# EAGLE board RS485-relaydriver (EAGLE 5.11)
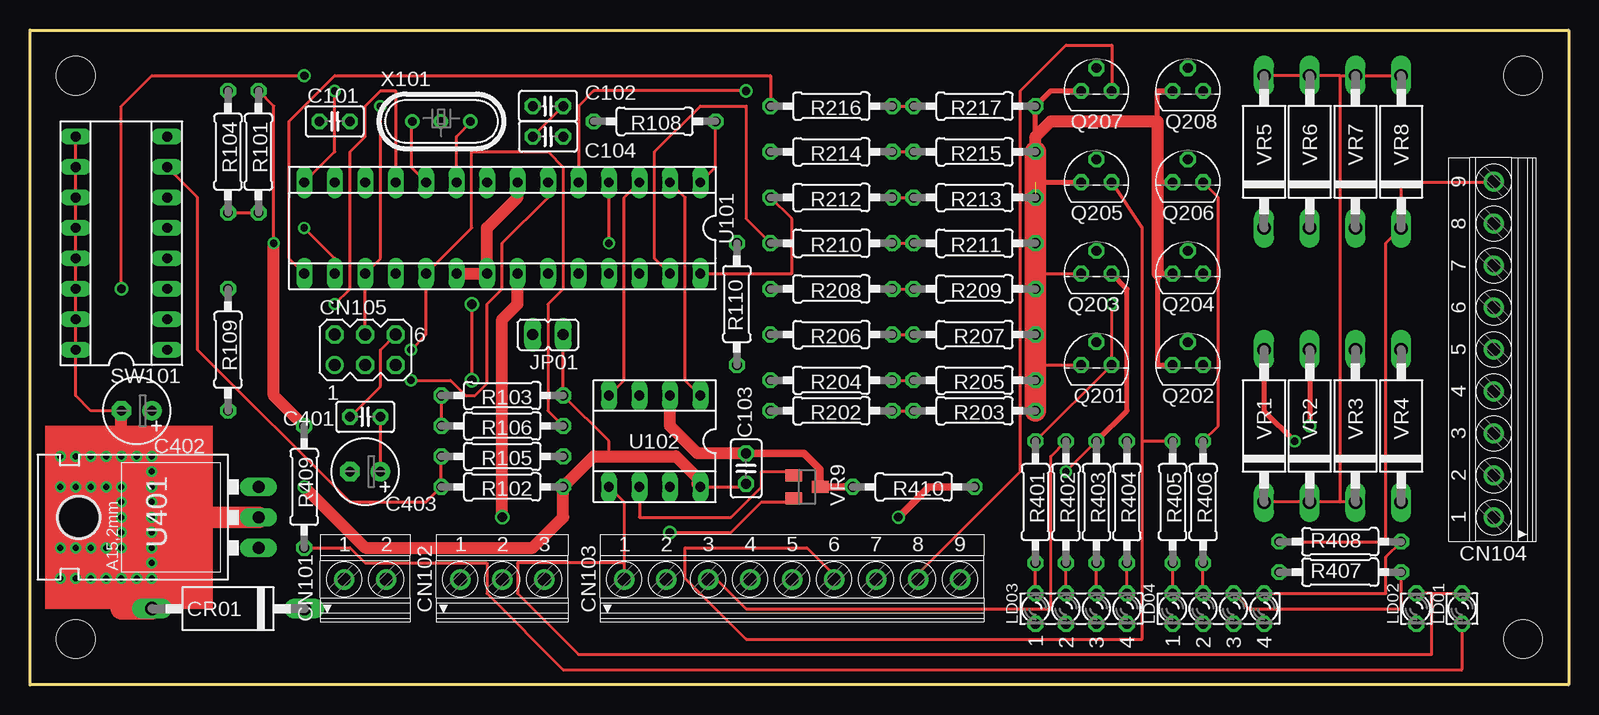
[diagram p0: board, top side]
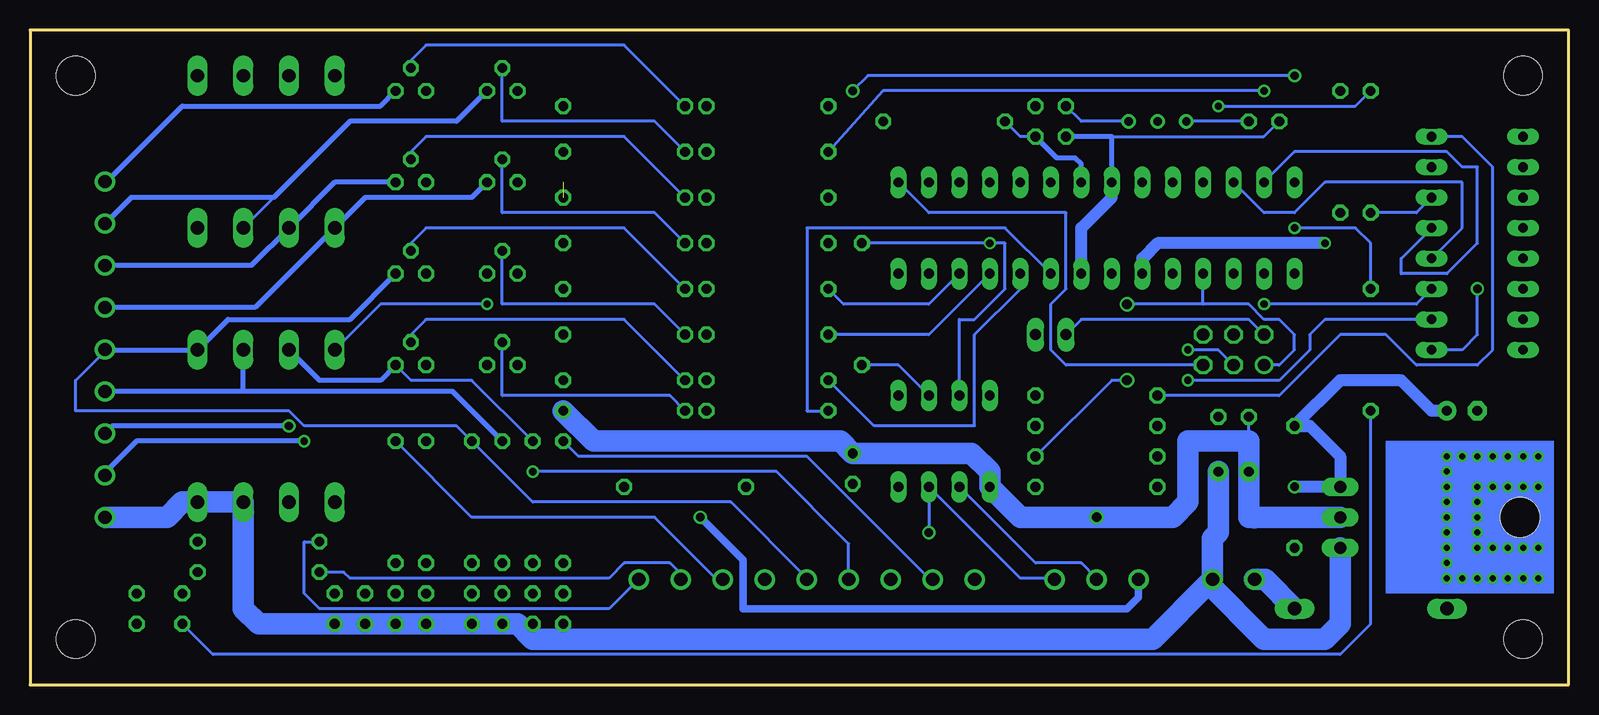
[diagram p1: board, bottom side, seen from below]

Size 128.27 x 54.61 mm. Coordinates in mm from the lower left corner, seen from the top.
Outline: 0,54.61 128.27,54.61 128.27,0 0,0 0,54.61
Copper layers (1*16): Top 0.035mm / dielectric 1.5mm / Bottom 0.035mm
Design rules "default": minimum track width 10mil, minimum drill 24mil, track to track 8mil, track to pad 8mil, pad to pad 8mil, via to via 8mil, smd to smd 8mil, copper to edge 40mil, drill to drill 8mil, minimum pad ring 10mil, minimum via ring 8mil, stop-mask expansion 4mil, vias tented up to drill 0mil, thermal gap 10mil
Holes 3.2 mm at 3.81,50.8 124.46,50.8 124.46,3.81 3.81,3.81

## Footprints (pad centres in the part's own frame; a part is rotated, then mirrored left to right if it is on the bottom)
C025-025X050 = drill 0.813 octagon: 1 -1.27,0; 2 1.27,0
E2,5-6 = drill 0.813 pad 1.6 round: + -1.27,0 | drill 0.813 pad 1.6 octagon: - 1.27,0
1751248 = drill 1.1 pad 1.7 round: 1 -1.75,-0.1; 2 1.75,-0.1
1751251 = drill 1.1 pad 1.7 round: 1 -3.5,-0.1; 2 0,-0.1; 3 3.5,-0.1
1751316 = drill 1.1 pad 1.7 round: 1 -13.973,-0.1; 2 -10.473,-0.1; 3 -6.973,-0.1; 4 -3.473,-0.1; 5 0.028,-0.1; 6 3.527,-0.1; 7 7.027,-0.1; 8 10.527,-0.1; 9 14.027,-0.1
MA03-2 = drill 1.016 round: 1 -2.54,-1.27 | drill 1.016 octagon: 2 -2.54,1.27; 3 0,-1.27; 4 0,1.27; 5 2.54,-1.27; 6 2.54,1.27
DO15-12 = drill 1.118 long: A 6.35,0; C -6.35,0
JP1 = drill 0.914 long: 1 0,-1.27; 2 0,1.27
LZR181 = drill 0.813 octagon: A -1.27,0; K 1.27,0
LZR184 = drill 0.813 octagon: A1 -1.27,3.81; A2 -1.27,1.27; A3 -1.27,-1.27; A4 -1.27,-3.81; K1 1.27,3.81; K2 1.27,1.27; K3 1.27,-1.27; K4 1.27,-3.81
TO92 = drill 0.813 octagon: 1 1.27,0; 2 0,1.905; 3 -1.27,0
0207/10 = drill 0.813 octagon: 1 -5.08,0; 2 5.08,0
SOCKET-16 = drill 0.813 long: 1 -8.89,-3.81; 2 -6.35,-3.81; 3 -3.81,-3.81; 4 -1.27,-3.81; 5 1.27,-3.81; 6 3.81,-3.81; 7 6.35,-3.81; 8 8.89,-3.81; 9 8.89,3.81; 10 6.35,3.81; 11 3.81,3.81; 12 1.27,3.81; 13 -1.27,3.81; 14 -3.81,3.81; 15 -6.35,3.81; 16 -8.89,3.81
SOCKET-28-3 = drill 0.813 long: 1 -16.51,-3.81; 2 -13.97,-3.81; 3 -11.43,-3.81; 4 -8.89,-3.81; 5 -6.35,-3.81; 6 -3.81,-3.81; 7 -1.27,-3.81; 8 1.27,-3.81; 9 3.81,-3.81; 10 6.35,-3.81; 11 8.89,-3.81; 12 11.43,-3.81; 13 13.97,-3.81; 14 16.51,-3.81; 15 16.51,3.81; 16 13.97,3.81; 17 11.43,3.81; 18 8.89,3.81; 19 6.35,3.81; 20 3.81,3.81; 21 1.27,3.81; 22 -1.27,3.81; 23 -3.81,3.81; 24 -6.35,3.81; 25 -8.89,3.81; 26 -11.43,3.81; 27 -13.97,3.81; 28 -16.51,3.81
SOCKET-08 = drill 0.813 long: 1 -3.81,-3.81; 2 -1.27,-3.81; 3 1.27,-3.81; 4 3.81,-3.81; 5 3.81,3.81; 6 1.27,3.81; 7 -1.27,3.81; 8 -3.81,3.81
TO220L1 = drill 1.016 long: 1 -2.54,-3.81; 2 0,-3.81; 3 2.54,-3.81 | hole 3.302: 0,11.176
SOT23 = smd 1 x 1.4: 1 -0.95,-1.1; 2 0.95,-1.1; 3 0,1.1
HC49U = drill 0.7 pad 1.2 round: 1 -2.413,0; 2 -0.027,0; 3 2.413,0

## Placement (x,y rotation side)
C101  [C025-025X050]  25.4,46.99 0 top
C102  [C025-025X050]  43.18,48.26 180 top
C103  [C025-025X050]  59.69,18.03 270 top
C104  [C025-025X050]  43.18,45.72 0 top
C401  [C025-025X050]  27.94,22.35 0 top
C402  [E2,5-6]  8.89,22.86 180 top
C403  [E2,5-6]  27.94,17.78 180 top
CN101  PWR  [1751248]  27.94,8.89 0 top
CN102  RS485  [1751251]  39.37,8.89 0 top
CN103  BUTTONS  [1751316]  63.5,8.89 0 top
CN104  RELAYS  [1751316]  121.92,27.94 90 top
CN105  [MA03-2]  27.94,27.94 0 top
CR01  [DO15-12]  16.51,6.35 180 top
JP01  [JP1]  43.18,29.21 90 top
LD01  [LZR181]  119.38,6.35 90 top
LD02  [LZR181]  115.57,6.35 90 top
LD03  [LZR184]  87.63,6.35 90 top
LD04  [LZR184]  99.06,6.35 90 top
Q201  [TO92]  88.9,26.67 0 top
Q202  [TO92]  96.52,26.67 0 top
Q203  [TO92]  88.9,34.29 0 top
Q204  [TO92]  96.52,34.29 0 top
Q205  [TO92]  88.9,41.91 0 top
Q206  [TO92]  96.52,41.91 0 top
Q207  [TO92]  88.9,49.53 0 top
Q208  [TO92]  96.52,49.53 0 top
R101  [0207/10]  19.05,44.45 90 top
R102  [0207/10]  39.37,16.51 0 top
R103  [0207/10]  39.37,24.13 0 top
R104  [0207/10]  16.51,44.45 90 top
R105  [0207/10]  39.37,19.05 0 top
R106  [0207/10]  39.37,21.59 0 top
R108  [0207/10]  52.07,46.99 0 top
R109  [0207/10]  16.51,27.94 90 top
R110  [0207/10]  58.93,31.75 270 top
R202  [0207/10]  66.8,22.86 0 top
R203  [0207/10]  78.74,22.86 0 top
R204  [0207/10]  66.8,25.4 0 top
R205  [0207/10]  78.74,25.4 0 top
R206  [0207/10]  66.8,29.21 0 top
R207  [0207/10]  78.74,29.21 0 top
R208  [0207/10]  66.8,33.02 0 top
R209  [0207/10]  78.74,33.02 0 top
R210  [0207/10]  66.8,36.83 0 top
R211  [0207/10]  78.74,36.83 0 top
R212  [0207/10]  66.8,40.64 0 top
R213  [0207/10]  78.74,40.64 0 top
R214  [0207/10]  66.8,44.45 0 top
R215  [0207/10]  78.74,44.45 0 top
R216  [0207/10]  66.8,48.26 0 top
R217  [0207/10]  78.74,48.26 0 top
R401  [0207/10]  83.82,15.24 90 top
R402  [0207/10]  86.36,15.24 90 top
R403  [0207/10]  88.9,15.24 90 top
R404  [0207/10]  91.44,15.24 90 top
R405  [0207/10]  95.25,15.24 90 top
R406  [0207/10]  97.79,15.24 90 top
R407  [0207/10]  109.22,9.4 180 top
R408  [0207/10]  109.22,11.94 180 top
R409  [0207/10]  22.86,16.51 90 top
R410  [0207/10]  73.66,16.51 0 top
SW101  [SOCKET-16]  7.62,36.83 90 top
U101  [SOCKET-28-3]  39.37,38.1 180 top
U102  [SOCKET-08]  52.07,20.32 180 top
U401  [TO220L1]  15.24,13.97 90 top
VR1  [DO15-12]  102.87,21.59 90 top
VR2  [DO15-12]  106.68,21.59 90 top
VR3  [DO15-12]  110.49,21.59 90 top
VR4  [DO15-12]  114.3,21.59 90 top
VR5  [DO15-12]  102.87,44.45 90 top
VR6  [DO15-12]  106.68,44.45 90 top
VR7  [DO15-12]  110.49,44.45 90 top
VR8  [DO15-12]  114.3,44.45 90 top
VR9  [SOT23]  64.77,16.51 270 top
X101  [HC49U]  34.29,46.99 0 top

## Library data of the parts
C101-C104 C401-C403 R101-R106 R108-R110 R202-R217 R401-R410 = resistor
CN101-CN104 = con-phoenix-350
CN105 = con-lstb
CR01 VR1-VR8 = diode
JP01 = jumper
LD01-LD04 = led
Q201-Q208 = transistor
SW101 U101 U102 = ic-package
U401 = v-reg
VR9 = smd-ipc
X101 = crystal

## Nets
12V: C401.2 C403.+ CN101.2 CN104.1 LD03.A1 LD03.A2 LD03.A3 LD03.A4 LD04.A1 LD04.A2 LD04.A3 LD04.A4 U401.1 VR1.C VR2.C VR3.C VR4.C VR5.A VR6.A VR7.A VR8.A
AS: CN103.7 CN104.7 Q206.1 R406.2 VR6.C
CN105: CN105.1 R105.2 U101.18
GND: C101.1 C102.1 C103.1 C104.1 C401.1 C402.- C403.- CN103.1 CN105.6 CR01.A LD01.K LD02.K Q201.3 Q202.3 Q203.3 Q204.3 Q205.3 Q206.3 Q207.3 Q208.3 R110.2 R203.2 R205.2 R207.2 R209.2 R211.2 R213.2 R215.2 R217.2 R410.1 SW101.9 SW101.10 SW101.11 SW101.12 SW101.13 SW101.14 SW101.15 SW101.16 U101.8 U101.22 U102.2 U102.5 U401.2 VR9.3
JP1: R202.1 U101.23
R103: R103.1 R106.1 SW101.8
S$1: C102.2 U101.9 X101.3
S$2: C101.2 U101.10 X101.1
S$3: CN102.2 U102.6 VR9.1
S$4: R110.1 U101.4 U102.3
S$5: U101.3 U102.4
S$6: LD01.A R409.1
S$7: LD03.K1 R401.1
S$8: R102.1 R105.1 SW101.7
S$9: R101.1 R104.1 SW101.6
S$10: CN105.2 JP01.2
S$11: CN102.3 U102.7 VR9.2
S$12: U101.2 U102.1
S$13: SW101.5 U101.13
S$14: SW101.4 U101.12
S$15: SW101.3 U101.11
S$16: SW101.2 U101.6
S$17: SW101.1 U101.5
S$18: CN105.3 R106.2 U101.19
S$19: LD03.K3 R403.1
S$20: CN105.4 R104.2 U101.17
S$21: CN105.5 R108.2 U101.1
S$22: LD02.A R109.1
S$23: LD04.K1 R405.1
S$24: LD04.K2 R406.1
S$25: LD04.K3 R407.1
S$26: LD04.K4 R408.1
S$27: CN103.2 CN104.2 Q201.1 R401.2 VR1.A
S$28: CN103.3 CN104.3 Q202.1 R402.2 VR2.A
S$29: CN103.4 CN104.4 Q203.1 R403.2 VR3.A
S$30: CN103.5 CN104.5 Q204.1 R404.2 VR4.A
S$31: CN103.6 CN104.6 Q205.1 R405.2 VR5.C
S$32: CN101.1 CR01.C
S$33: CN103.8 CN104.8 Q207.1 R407.2 VR7.C
S$34: CN103.9 CN104.9 Q208.1 R408.2 VR8.C
S$35: R109.2 U101.16
S$36: Q201.2 R202.2 R203.1
S$37: CN102.1 R410.2
S$38: LD03.K4 R404.1
S$39: LD03.K2 R402.1
S$40: Q202.2 R204.2 R205.1
S$41: Q203.2 R206.2 R207.1
S$42: Q204.2 R208.2 R209.1
S$43: Q205.2 R210.2 R211.1
S$44: Q206.2 R212.2 R213.1
S$45: Q207.2 R214.2 R215.1
S$46: Q208.2 R216.2 R217.1
S$47: R204.1 U101.24
S$48: R206.1 U101.25
S$49: R208.1 U101.26
S$50: R210.1 U101.27
S$51: R212.1 U101.28
S$52: R214.1 U101.14
S$53: R216.1 U101.15
VCC: C103.2 C104.2 C402.+ JP01.1 R101.2 R102.2 R103.2 R108.1 R409.2 U101.7 U101.20 U101.21 U102.8 U401.3

## Tracks (layer width: path | path; a pad name or v marks a point on that pad's centre or on a via)
12V
  Top 0.254: C403.+ C401.2 | VR5.A VR6.A 109.22,50.8 | 109.22,50.8 VR7.A VR8.A | VR1.C VR2.C 109.22,15.24 | VR3.C 109.22,15.24 | 109.22,15.24 109.22,50.8
  Bottom 0.254: 87.63,5.08 LD03.A2 | 83.82,3.81 LD03.A1
  Bottom 1.778: 30.04,8.45 CN101.2 29.69,12.22 29.21,12.7 C403.+ | 30.04,8.45 34.67,3.81 83.82,3.81 86.36,3.81 87.63,5.08 LD03.A3 LD03.A4 LD04.A1 LD04.A2 LD04.A3 LD04.A4 109.22,5.08 110.49,6.35 VR3.C VR4.C 115.57,15.24 116.84,13.97 CN104.1 | U401.1 19.05,5.08 20.32,3.81 25.4,3.81 30.04,8.45
AS
  Top 0.254: R406.2 99.06,21.59 99.06,40.64 Q206.1
  Bottom 0.254: R406.2 91.44,13.97 76.2,13.97 71.12,8.89 CN103.7
  Bottom 0.406: Q206.1 102.87,41.91 VR6.C 109.81,34.97 CN104.7
CN105  (via drill 0.8)
  Top 0.254: v36.83,31.75 v36.83,25.4
  Bottom 0.254: R105.2 38.1,25.4 v36.83,25.4 | 30.48,31.75 v36.83,31.75 | 30.48,31.75 U101.18 | 30.48,31.75 26.67,31.75 25.4,30.48 24.13,30.48 22.86,29.21 22.86,27.94 24.13,26.67 CN105.1
GND  (via drill 0.5, 0.5 pad 0.25, 0.8)  (1 unrouted)
  Top 0.254: 83.82,34.29 Q203.3 | 83.82,26.67 Q201.3 | 116.84,7.62 LD01.K | 116.84,7.62 LD02.K | C104.1 C102.1 | 116.84,7.62 116.84,2.54 45.72,2.54 40.64,7.62 40.64,10.16 49.53,10.16 | CN103.1 49.53,8.89 49.53,10.16 | 49.53,10.16 49.53,15.24 U102.5 | SW101.9 SW101.10 SW101.11 SW101.12 SW101.13 SW101.14 SW101.15 SW101.16 3.81,24.13 5.08,22.86 C402.- | CN105.6 29.21,27.94 29.21,24.89 C401.1
  Top 0.406: Q202.3 93.98,26.67 93.98,34.29 Q204.3 | Q208.3 93.98,49.53 93.98,46.99 | 93.98,41.91 Q206.3 | Q207.3 85.09,49.53 R217.2 R215.2 | 83.82,41.91 Q205.3
  Top 0.61: R410.1 VR9.3 65.87,17.95 64.52,19.3 C103.1
  Top 1.016: 93.98,34.29 93.98,41.91 93.98,46.99 85.09,46.99 83.82,45.72 R215.2 | U102.2 53.34,21.59 55.63,19.3 C103.1 | U101.22 40.64,31.75 39.37,30.48 v39.37,13.97 | v7.62,13.97 v7.62,15.24 v7.62,16.51 v7.62,19.05 C402.-
  Top 1.778: R215.2 83.82,41.91 R211.2 83.82,34.29 R209.2 R207.2 83.82,26.67 R205.2 R203.2 | CR01.A 7.62,6.35 v7.62,8.89 v7.62,11.43 v7.62,12.7 v7.62,13.97 v10.16,13.97 U401.2
  Bottom 0.254: R110.2 55.88,26.67 U102.2 | C101.1 25.4,45.72 38.1,45.72 | R203.2 82.55,21.59 | 26.67,20.32 C401.1
  Bottom 0.406: C104.1 38.1,45.72 U101.8
  Bottom 1.016: U101.8 38.1,40.64 40.64,38.1 U101.22
  Bottom 1.778: R203.2 81.28,20.32 60.71,20.32 C103.1 49.78,19.3 48.26,17.78 U102.5 45.72,13.97 v39.37,13.97 33.02,13.97 31.75,15.24 31.75,20.32 26.67,20.32 C403.- 26.67,13.97 26.16,13.97 | 26.16,13.97 26.19,13.94 | U401.2 26.16,13.97
JP1
  Bottom 0.254: U101.23 46.99,38.1 63.5,38.1 63.5,22.86 R202.1
R103
  Top 0.254: R103.1 R106.1
  Bottom 0.254: SW101.8 8.89,45.72 6.35,43.18 6.35,27.94 7.62,26.67 12.7,26.67 15.24,29.21 19.05,29.21 24.13,24.13 R103.1
S$1
  Top 0.254: U101.9 35.56,45.72 36.83,46.99 X101.3
  Bottom 0.254: C102.2 40.64,46.99 X101.3
S$2
  Top 0.254: U101.10 31.75,43.18 31.75,46.99 X101.1
  Bottom 0.254: C101.2 X101.1
S$3
  Top 0.254: U102.6 50.8,13.97 58.42,13.97 60.96,16.51 60.96,17.78 63.5,17.78 VR9.1
  Bottom 0.254: U102.6 44.45,10.16 40.64,10.16 39.37,8.89 CN102.2
S$4  (via drill 0.61)
  Top 0.254: v48.26,36.83 U101.4
  Bottom 0.254: U102.3 50.8,30.48 49.53,30.48 46.99,33.02 46.99,36.83 v48.26,36.83 R110.1
S$5
  Top 0.254: U102.4 49.53,25.4 49.53,40.64 U101.3
S$6
  Top 0.254: R409.1 26.67,11.43 27.94,10.16 38.1,10.16 38.1,7.62 44.45,1.27 119.38,1.27 LD01.A
S$7
  Top 0.254: LD03.K1 R401.1
S$8
  Top 0.254: R105.1 R102.1 33.02,15.24 26.67,15.24 13.97,27.94 13.97,40.64 SW101.7
S$9
  Top 0.254: R104.1 R101.1
  Bottom 0.254: SW101.6 12.7,39.37 R104.1
S$10
  Bottom 0.254: JP01.2 40.64,30.48 26.67,30.48 CN105.2
S$11  (via drill 0.7)
  Top 0.254: VR9.2 63.5,15.24 60.96,15.24 58.42,12.7 v53.34,12.7 | CN102.3 43.18,8.89
  Bottom 0.254: CN102.3 43.18,8.89 45.72,8.89 U102.7 v53.34,12.7
S$12
  Top 0.254: U102.1 54.61,25.4 54.61,40.64 U101.2
S$13
  Bottom 0.254: SW101.5 13.97,35.56 13.97,34.29 10.16,34.29 7.62,36.83 7.62,43.18 8.89,43.18 10.16,44.45 22.86,44.45 U101.13
S$14
  Bottom 0.254: SW101.4 8.89,38.1 8.89,41.91 20.32,41.91 22.86,39.37 25.4,39.37 U101.12
S$15  (via drill 0.61)
  Top 0.254: v25.4,31.75 26.67,33.02 26.67,44.45 27.94,45.72 27.94,48.26 29.21,49.53 30.48,49.53 U101.11
  Bottom 0.254: SW101.3 12.7,31.75 v25.4,31.75
S$16  (via drill 0.61)
  Top 0.254: v31.75,25.4 35.05,25.4 36.32,24.13 37.08,24.13 38.1,25.15 38.1,31.75 39.37,33.02 39.37,36.83 43.18,40.64 U101.6
  Bottom 0.254: v31.75,25.4 24.13,25.4 21.59,27.94 21.59,29.21 20.32,30.48 SW101.2
S$17  (via drill 0.7)
  Top 0.254: v7.62,33.02 7.62,48.26 10.16,50.8 v22.86,50.8 | v59.69,49.53 46.99,49.53 45.72,48.26 U101.5
  Bottom 0.254: SW101.1 8.89,27.94 7.62,29.21 v7.62,33.02 | v22.86,50.8 58.42,50.8 v59.69,49.53
S$18  (via drill 0.61)
  Top 0.254: R106.2 43.18,22.86 43.18,31.75 44.45,33.02 44.45,43.18 43.18,44.45 36.83,44.45 36.83,38.1 U101.19 33.02,29.21 v31.75,27.94
  Bottom 0.254: CN105.3 29.21,27.94 v31.75,27.94
S$19
  Top 0.254: LD03.K3 R403.1
S$20  (via drill 0.61)
  Top 0.254: CN105.4 U101.17 29.21,35.56 v29.21,48.26
  Bottom 0.254: R104.2 17.78,48.26 v29.21,48.26
S$21
  Top 0.254: U101.1 57.15,43.18 R108.2
  Bottom 0.254: CN105.5 41.91,26.67 43.18,27.94 43.18,31.75 41.91,33.02 41.91,39.37 53.34,39.37 U101.1
S$22
  Bottom 0.254: LD02.A 113.03,2.54 19.05,2.54 16.51,5.08 R109.1
S$23
  Top 0.254: LD04.K1 R405.1
S$24
  Top 0.254: LD04.K2 R406.1
S$25
  Top 0.254: LD04.K3 101.6,6.35 114.3,6.35 R407.1
S$26
  Top 0.254: LD04.K4 113.03,7.62 113.03,10.67 R408.1
S$27  (via drill 0.61)
  Top 0.254: R401.2 Q201.1 v90.17,31.75
  Top 0.406: v105.41,20.32 102.87,22.86 VR1.A
  Bottom 0.254: VR1.A 99.06,31.75 v90.17,31.75 | R401.2 82.55,19.05 63.5,19.05 53.34,8.89 CN103.2 | 121.92,17.78 CN104.2
  Bottom 0.406: 121.92,17.78 119.38,20.32 v105.41,20.32
S$28  (via drill 0.7)
  Top 0.254: R402.2 85.09,19.05 85.09,6.35 59.69,6.35 57.15,8.89 CN103.3
  Top 0.406: VR2.A v106.68,21.59
  Bottom 0.254: Q202.1 96.52,25.4 91.44,25.4 R402.2
  Bottom 0.406: Q202.1 99.06,25.4 104.14,25.4 VR2.A | CN104.3 121.4,21.59 v106.68,21.59
S$29  (via drill 0.61)
  Top 0.254: v86.36,17.78 R403.2
  Top 0.406: Q203.1 91.44,33.02 91.44,22.86 R403.2
  Bottom 0.254: CN103.4 60.03,11.77 66.04,17.78 v86.36,17.78
  Bottom 0.406: 110.49,24.47 93.05,24.47 R403.2 | 110.49,24.47 CN104.4 | 110.49,24.47 VR3.A
S$30
  Top 0.254: CN104.5 121.92,27.94
  Bottom 0.254: CN103.5 63.5,8.89 69.85,15.24 86.36,15.24 R404.2 92.71,21.59 105.41,21.59 106.68,22.86 124.46,22.86 124.46,25.4 121.92,27.94 CN104.5
  Bottom 0.406: Q204.1 101.6,30.48 111.76,30.48 VR4.A 121.92,27.94
S$31
  Top 0.254: 92.71,20.32 R405.2 | 92.71,20.32 92.71,38.1 Q205.1 | 92.71,20.32 92.71,3.81 59.69,3.81 54.61,8.89 54.61,11.43 64.77,11.43 67.31,8.89 CN103.6
  Bottom 0.406: Q205.1 91.44,40.64 100.33,40.64 VR5.C 109.5,31.47 CN104.6
S$32
  Bottom 1.778: CN101.1 25.3,8.79 CR01.C
S$33
  Top 0.254: Q207.1 90.17,53.34 86.36,53.34 82.55,49.53 82.55,17.78 73.66,8.89 CN103.8
  Bottom 0.254: 107.95,40.64 VR7.C | R407.2 102.11,9.4 101.6,8.89 80.01,8.89 78.74,10.16 74.93,10.16 73.66,8.89 CN103.8
  Bottom 0.406: Q207.1 92.71,46.99 101.6,46.99 107.95,40.64 119.85,40.64 CN104.8
S$34
  Top 0.254: CN104.9 121.92,41.91 114.3,41.91 VR8.C 113.03,36.83 113.03,11.94 R408.2
  Bottom 0.254: CN104.9 121.92,41.91 | R408.2 105.41,11.94 105.41,7.62 104.14,6.35 80.01,6.35 77.47,8.89 CN103.9
  Bottom 0.406: Q208.1 99.06,48.26 115.57,48.26 121.92,41.91
S$35  (via drill 0.61)
  Top 0.254: v22.86,38.1 25.4,35.56 U101.16
  Bottom 0.254: v22.86,38.1 17.78,38.1 16.51,36.83 R109.2
S$36
  Top 0.254: R202.2 R203.1
  Bottom 0.254: R203.1 74.93,24.13 88.9,24.13 Q201.2
S$37  (via drill 0.7)
  Top 0.61: v72.39,13.97 74.93,16.51 R410.2
  Bottom 0.61: CN102.1 35.87,7.31 36.83,6.35 68.83,6.35 68.83,10.41 v72.39,13.97
S$38
  Top 0.254: LD03.K4 R404.1
S$39
  Top 0.254: LD03.K2 R402.1
S$40
  Top 0.254: R204.2 R205.1
  Bottom 0.254: R205.1 78.74,30.48 95.25,30.48 96.52,29.21 Q202.2
S$41
  Top 0.254: R206.2 R207.1
  Bottom 0.254: R207.1 76.2,31.75 88.9,31.75 Q203.2
S$42
  Top 0.254: R208.2 R209.1
  Bottom 0.254: R209.1 78.74,38.1 95.25,38.1 96.52,36.83 Q204.2
S$43
  Top 0.254: R210.2 R211.1
  Bottom 0.254: R211.1 76.2,39.37 88.9,39.37 Q205.2
S$44
  Top 0.254: R212.2 R213.1
  Bottom 0.254: R213.1 78.74,45.72 95.25,45.72 96.52,44.45 Q206.2
S$45
  Top 0.254: R214.2 R215.1
  Bottom 0.254: R215.1 76.2,46.99 88.9,46.99 Q207.2
S$46
  Top 0.254: R216.2 R217.1
  Bottom 0.254: R217.1 78.74,53.34 95.25,53.34 96.52,52.07 Q208.2
S$47
  Bottom 0.254: U101.24 45.72,33.02 49.53,29.21 49.53,21.59 57.91,21.59 R204.1
S$48
  Bottom 0.254: U101.25 53.34,29.21 R206.1
S$49
  Bottom 0.254: U101.26 53.34,31.75 60.45,31.75 R208.1
S$50
  Top 0.254: U101.27 52.07,35.56 52.07,44.45 55.88,48.26 59.69,48.26 59.69,38.86 R210.1
S$51
  Top 0.254: U101.28 63.5,34.29 63.5,38.86 R212.1
S$52  (via drill 0.61)
  Top 0.254: U101.14 25.4,44.45 v25.4,49.53
  Bottom 0.254: v25.4,49.53 57.15,49.53 R214.1
S$53
  Top 0.254: U101.15 21.59,35.56 21.59,46.99 25.4,50.8 61.72,50.8 R216.1
S$54  (via drill 0.5 pad 0.25)
  other vias: 2.54,16.51
S$55  (via drill 0.5 pad 0.25)
  other vias: 5.08,16.51
S$56  (via drill 0.5 pad 0.25)
  other vias: 6.35,16.51
S$57  (via drill 0.5 pad 0.25)
  other vias: 3.81,16.51
S$58  (via drill 0.5 pad 0.25)
  other vias: 6.35,11.43
S$59  (via drill 0.5 pad 0.25)
  other vias: 5.08,11.43
S$60  (via drill 0.5 pad 0.25)
  other vias: 3.81,11.43
S$61  (via drill 0.5 pad 0.25)
  other vias: 2.54,11.43
S$62  (via drill 0.5 pad 0.25)
  other vias: 2.54,8.89
S$63  (via drill 0.5 pad 0.25)
  other vias: 3.81,8.89
S$64  (via drill 0.5 pad 0.25)
  other vias: 5.08,8.89
S$65  (via drill 0.5 pad 0.25)
  other vias: 6.35,8.89
S$66  (via drill 0.5 pad 0.25)
  other vias: 2.54,19.05
S$67  (via drill 0.5 pad 0.25)
  other vias: 3.81,19.05
S$68  (via drill 0.5 pad 0.25)
  other vias: 5.08,19.05
S$69  (via drill 0.5 pad 0.25)
  other vias: 6.35,19.05
S$70  (via drill 0.5)
  other vias: 8.89,19.05
S$71  (via drill 0.5)
  other vias: 10.16,19.05
S$72  (via drill 0.5)
  other vias: 10.16,17.78
S$73  (via drill 0.5)
  other vias: 10.16,16.51
S$74  (via drill 0.5)
  other vias: 10.16,15.24
S$75  (via drill 0.5)
  other vias: 10.16,12.7
S$76  (via drill 0.5)
  other vias: 10.16,11.43
S$77  (via drill 0.5)
  other vias: 10.16,10.16
S$78  (via drill 0.5)
  other vias: 10.16,8.89
S$79  (via drill 0.5)
  other vias: 8.89,8.89
VCC  (via drill 0.61, 0.7)
  Top 0.254: U102.8 59.69,16.51 C103.2 | JP01.1 R103.2 48.26,20.32 48.26,19.05 | R101.2 20.32,48.26 v20.32,36.83
  Top 1.016: v20.32,36.83 20.32,24.13 R409.2 | U101.7 40.64,40.64 38.1,38.1 U101.21 U101.20 | v22.86,16.51 27.94,11.43 41.91,11.43 44.45,13.97 R102.2 46.99,19.05 48.26,19.05 53.85,19.05 55.63,17.27 55.63,16.76 U102.8
  Bottom 0.254: R108.1 45.72,45.72 C104.2
  Bottom 0.406: U101.7 40.64,43.43 41.15,43.94 42.67,43.94 C104.2
  Bottom 1.016: v20.32,36.83 34.29,36.83 35.56,35.56 U101.20 | v22.86,16.51 U401.3 19.05,19.05 21.59,21.59 R409.2 19.05,25.4 13.97,25.4 11.43,22.86 C402.+
(copper drawn outside any net)
  shapes: Bottom area x2, Top area x6